# Altium PCB PMI_Split.PcbDoc
Units mm, origin at the board's own origin, x right, y up, seen from the top; angles counter-clockwise.
Board outline 65 x 25 mm, 2 copper layers (Top Layer, Bottom Layer); 15 components, 11 nets, 34 pads, 1 vias.
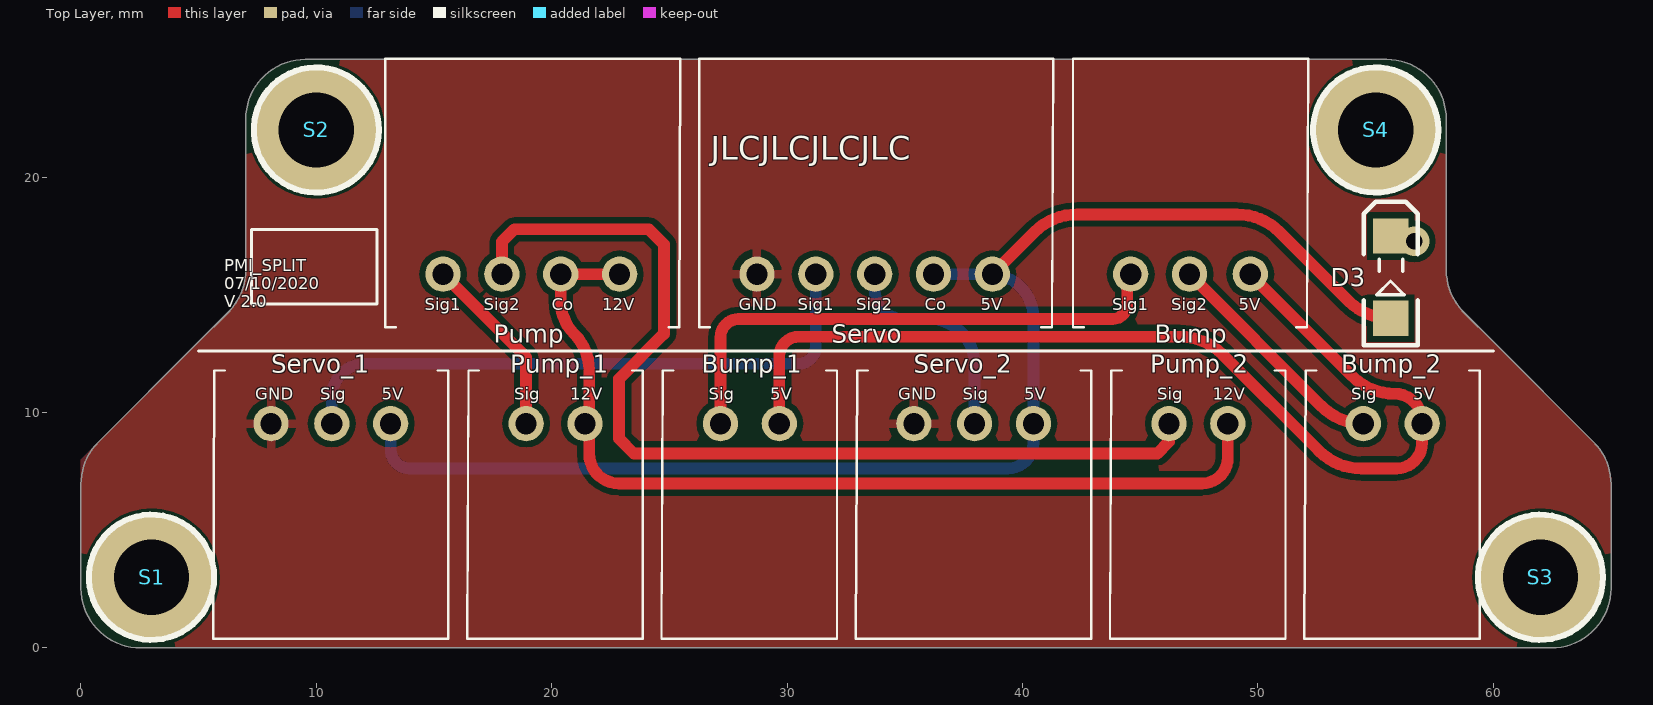
[diagram p0: Top Layer view]
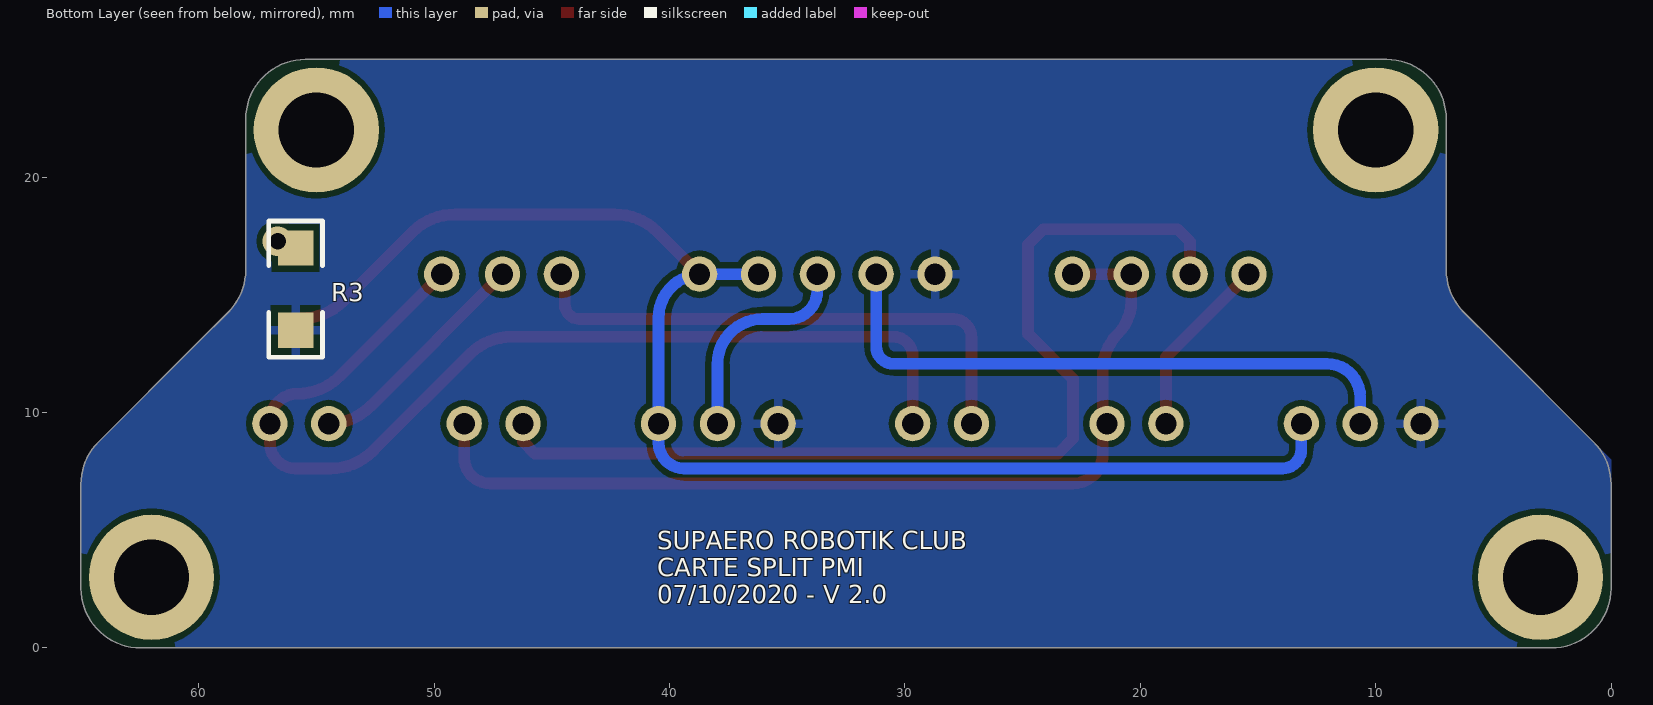
[diagram p1: Bottom Layer view, seen from below]
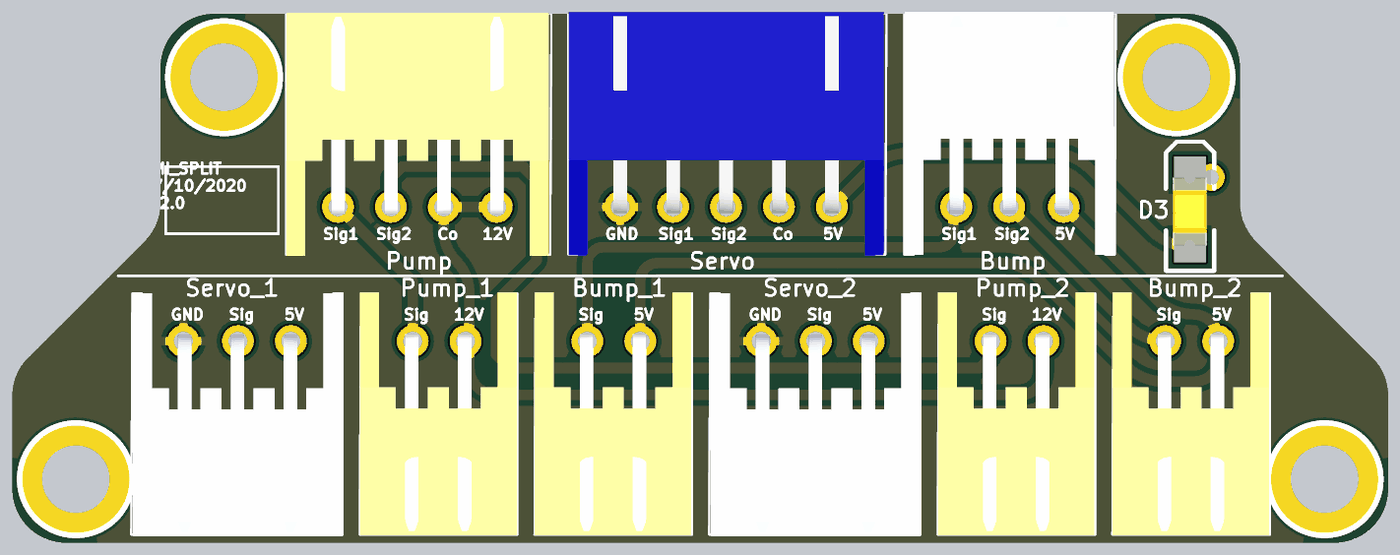
[diagram p2: 3D render of the assembled board from above, using the file's embedded part models]

## Layer stack, top to bottom
Top Solder: solder mask 0.0102, Solder Resist, Dk 3.5
Top Layer: signal copper 0.0356
Dielectric 1: dielectric 0.32, FR-4, Dk 4.8
Bottom Layer: signal copper 0.0356
Bottom Solder: solder mask 0.0102, Solder Resist, Dk 3.5

## Board outline
14,0 2.54,0 cw(c2.54,2.54) 0,2.54 0,4 0,6.948 cw(c2.54,6.948) 0.744,8.744 5,13 6.256,14.256 ccw(c4.46,16.052) 7,16.052 7,20 7,22.46 cw(c9.54,22.46) 9.54,25 13,25 55.46,25 cw(c55.46,22.46) 58,22.46 58,19 58,16.052 ccw(c60.54,16.052) 58.744,14.256 60,13 64.256,8.744 cw(c62.46,6.948) 65,6.948 65,5 65,2.54 cw(c62.46,2.54) 62.46,0 58,0

## Design rules (kind name [scope] priority, off if disabled: settings)
Clearance [All] p1: gap=0.254
ComponentClearance ComponentClearance_Screws [HasFootprint('Screw M3')] p1: gap=0 collisioncheckmode=3 verticalgap=0 showdistances=FALSE
ComponentClearance [All] p2: gap=0.254 collisioncheckmode=3 verticalgap=0.254 showdistances=FALSE
PolygonConnect [All] p1: connectstyle=Relief reliefconductorwidth=0.381 reliefentries=4 polygonreliefangle="90 Angle" airgapwidth=0.305
RoutingVias [All] p1: holewidth=0.711 width=1.27 viastyle="Through Hole" minholewidth=0.711 minwidth=1.27 maxholewidth=0.711 maxwidth=1.27
SolderMaskExpansion [All] p1: expansion=0.102
Width [All] p1: maxlimit=2 minlimit=0.1 preferedwidth=0.5
29 further rules are at their usual default settings.

## Components (designator, comment, footprint, x,y, rotation, side; value= is the part's Value field where it differs from the comment)
Bump "Header 3H" S3B-XH-A 44.593,15.875 r0 top locked
Bump_1 "Header 2H" S2B-XH-A 29.667,9.525 r180 top locked
Bump_2 "Header 2H" S2B-XH-A 56.972,9.525 r180 top locked
D3 "5V_A" KP-3216SEC 55.642,15.748 r90 top
Pump "Header 4H" S4B-XH-A 15.383,15.875 r0 top locked
Pump_1 "Header 2H" S2B-XH-A 21.412,9.525 r180 top locked
Pump_2 "Header 2H" S2B-XH-A 48.717,9.525 r180 top locked
R3 "Res2" "Resistor 1206" 55.88,15.24 r270 bottom
S1 "Screw M3" "Screw M3" 3,3 r0 top
S2 "Screw M3" "Screw M3" 10,22 r0 top
S3 "Screw M3" "Screw M3" 62,3 r0 top
S4 "Screw M3" "Screw M3" 55,22 r0 top
Servo "Header 5H" S5B-XH-A 28.718,15.875 r0 top locked
Servo_1 "S3B-XH-A" S3B-XH-A 13.157,9.525 r180 top locked
Servo_2 "S3B-XH-A" S3B-XH-A 40.462,9.525 r180 top locked

## Footprints (in the part's own frame and the unit in brackets; to place one, negate y for a bottom-side part, rotate by r counter-clockwise, add the part's x,y. Pads: shape width x height; smd on the part's side, far side on the other; paste and mask are expansions set on the pad)
KP-3216SEC [mm]
  rect 1.5x1.5 smd: 1(-1.75,0) 2(1.75,0)
  silkscreen extent -2.89,-1.14 3.2,1.14, body extent -1.7,-0.79 1.5,0.81, height 1.1
"Resistor 1206" [mm]
  rect 1.5x1.5 smd: 1(-1.75,0) 2(1.75,0)
  silkscreen extent -2.89,-1.14 2.89,1.14, body extent -1.98,-0.95 1.98,0.93, height 0.55
S2B-XH-A [mm]
  round 1.5 hole 0.9: 1(0,0) 2(2.5,0)
  silkscreen extent -2.45,-2.26 5,9.14, body extent -2.41,-2.32 4.99,9.18, height 6.15
S3B-XH-A [mm]
  round 1.5 hole 0.9: 1(0,0) 2(2.5,0) 3(5.08,0)
  silkscreen extent -2.45,-2.26 7.54,9.14, body extent -2.44,-2.27 7.46,9.23, height 6.15
S4B-XH-A [mm]
  round 1.5 hole 0.9: 1(0,0) 2(2.5,0) 3(5,0) 4(7.5,0)
  silkscreen extent -2.45,-2.26 10.08,9.14, body extent -2.44,-2.32 9.96,9.18, height 6.15
S5B-XH-A [mm]
  round 1.5 hole 0.9: 1(0,0) 2(2.5,0) 3(5,0) 4(7.5,0) 5(10,0)
  silkscreen extent -2.45,-2.26 12.58,9.14, body extent -2.45,-2.3 12.45,9.2, height 6.15
"Screw M3" [mm] "M3 iso Screw"
  round 5.32 hole 3.2 unplated: 0(0,0)
  silkscreen extent -2.66,-2.66 2.66,2.66

## Part data
Bump: "Header, 3-Pin, Right Angle"
Bump_1 Bump_2 Pump_1 Pump_2: "Header, 2-Pin, Right Angle"
D3: library part LED2, "Typical RED, GREEN, YELLOW, AMBER GaAs LED"
Pump: "Header, 4-Pin, Right Angle"
R3: "Resistor"
Servo: "Header, 5-Pin, Right Angle"
Servo_1 Servo_2: library part "Header 3H", "Header, 3-Pin, Right Angle"

## Via types
v1: diameter 1.27, hole 0.711, Top Layer to Bottom Layer, 1 vias

## Nets (pads, with @x,y where several pads share a name; then routed paths per layer and width w, separated by ;. In a path a pad name is that pad's centre, name@x,y a point inside that pad or via, vN(x,y) a via of type N, cw(c..) or ccw(c..) an arc to the next point about the centre after c; other vN are vias at no path point)
5V_L: Bump.3 Bump_1.1 Bump_2.1 | length 44.2
  Top Layer w0.5: Bump_1.1 29.667,12.403 cw(c30.48,12.403) 30.48,13.216 46.692,13.216 cw(c46.692,10.676) 48.488,12.472 52.596,8.364 ccw(c54.392,10.16) 54.392,7.62 55.88,7.62 ccw(c55.88,8.712) 56.972,8.712 Bump_2.1 56.972,9.628 ccw(c55.805,9.628) 55.805,10.795 cw(c55.805,13.335) 54.009,11.539 Bump.3
BUMP_1: Bump.1 Bump_1.2 | length 23.1
  Top Layer w0.5: Bump_1.2 27.167,13.197 cw(c27.94,13.197) 27.94,13.97 43.815,13.97 ccw(c43.815,14.605) 44.45,14.605 44.45,15.732 cw(c44.593,15.732) Bump.1
BUMP_2: Bump.2 Bump_2.2 | length 9.9
  Top Layer w0.5: Bump.2 52.715,10.253 ccw(c54.472,12.01) Bump_2.2
GND_A: R3.2 Servo.1 Servo_1.3 Servo_2.3
NetD3_2: D3.2 R3.1
  other v1: 56.642,17.272
PUMP_1: Pump.1 Pump_1.2 | length 7.8
  Top Layer w0.5: Pump.1 18.912,12.346 Pump_1.2
PUMP_2: Pump.2 Pump_2.2 | length 42.4
  Top Layer w0.5: Pump.2 17.883,17.248 18.415,17.78 24.13,17.78 24.765,17.145 24.765,13.335 22.86,11.43 22.86,8.89 23.495,8.255 45.72,8.255 46.217,8.752 Pump_2.2
PUMP_L_CO: Pump.3 Pump.4 Pump_1.1 Pump_2.1 | length 40.4
  Top Layer w0.5: Pump.4 Pump.3 20.383,14.716 ccw(c22.336,14.716) 20.955,13.335 cw(c19.422,11.802) 21.59,11.802 21.59,8.255 ccw(c22.86,8.255) 22.86,6.985 47.625,6.985 ccw(c47.625,8.077) 48.717,8.077 Pump_2.1
SERVO_1: Servo.2 Servo_1.2 | length 26
  Bottom Layer w0.5: Servo_1.2 10.657,10.657 cw(c12.065,10.657) 12.065,12.065 30.48,12.065 ccw(c30.48,12.803) 31.218,12.803 Servo.2
SERVO_2: Servo.3 Servo_2.2 | length 9.2
  Bottom Layer w0.5: Servo.3 33.718,15.177 ccw(c34.925,15.177) 34.925,13.97 36.035,13.97 cw(c36.035,12.043) 37.962,12.043 Servo_2.2
SERVO_L_CO: D3.1 Servo.4 Servo.5 Servo_1.1 Servo_2.1 | length 59.6
  Top Layer w0.5: Servo.5 40.514,17.671 cw(c42.31,15.875) 42.31,18.415 49.113,18.415 cw(c49.113,15.875) 50.909,17.671 53.838,14.742 ccw(c55.634,16.538) 55.634,13.998 D3.1
  Bottom Layer w0.5: Servo_1.1 13.157,8.433 ccw(c13.97,8.433) 13.97,7.62 39.37,7.62 ccw(c39.37,8.712) 40.462,8.712 Servo_2.1 40.462,14.021 ccw(c38.608,14.021) 38.608,15.875 Servo.4
pads on no net: S1.0 S2.0 S3.0 S4.0

## Polygon pours and split planes (outlines as drawn)
GND_A on Top Layer "Top GND" (solid, remove dead copper, pour order 2): 0,3 0,8 4,12 6.256,14.256 ccw(c4.46,16.052) 7,16.052 7,19 7,22.46 cw(c9.54,22.46) 9.54,25 26,25 55.46,25 cw(c55.46,22.46) 58,22.46 58,20 58,16.052 ccw(c60.54,16.052) 58.744,14.256 61,12 64.256,8.744 cw(c62.46,6.948) 65,6.948 65,5 65,2.54 cw(c62.46,2.54) 62.46,0 59,0 2.54,0 cw(c2.54,2.54) 0,2.54
GND_A on Bottom Layer "Bot GND" (solid, remove dead copper, pour order 1): 0,3 0,8 4,12 6.256,14.256 ccw(c4.46,16.052) 7,16.052 7,19 7,22.46 cw(c9.54,22.46) 9.54,25 26,25 55.46,25 cw(c55.46,22.46) 58,22.46 58,20 58,16.052 ccw(c60.54,16.052) 58.744,14.256 61,12 64.256,8.744 cw(c62.46,6.948) 65,6.948 65,5 65,2.54 cw(c62.46,2.54) 62.46,0 59,0 2.54,0 cw(c2.54,2.54) 0,2.54

## Silkscreen, mask and mechanical layers (free items; w line width, h text height)
Top Overlay:
  lines w0.127: 5,12.619 60,12.619 ; 7.239,14.605 12.573,14.605 12.573,17.78 7.239,17.78 7.239,14.605
  text "JLCJLCJLCJLC" at 26.752,20.733 h1
  text "PMI_SPLIT / 07/10/2020 / V 2.0" at 6.096,14.478 h0.51
  text "Sig1" at 14.605,14.351 h0.51
  text "Sig2" at 17.105,14.351 h0.51
  text "Co" at 20.002,14.351 h0.51
  text "12V" at 22.138,14.351 h0.51
  text "GND" at 27.94,14.351 h0.51
  text "Sig1" at 30.44,14.351 h0.51
  text "Sig2" at 32.94,14.351 h0.51
  text "Co" at 35.837,14.351 h0.51
  text "5V" at 38.227,14.351 h0.51
  text "Sig1" at 43.815,14.351 h0.51
  text "Sig2" at 46.315,14.351 h0.51
  text "5V" at 49.182,14.351 h0.51
  text "GND" at 7.409,10.541 h0.51
  text "Sig" at 10.156,10.541 h0.51
  text "5V" at 12.776,10.541 h0.51
  text "Sig" at 18.411,10.541 h0.51
  text "12V" at 20.784,10.541 h0.51
  text "Sig" at 26.666,10.541 h0.51
  text "5V" at 29.286,10.541 h0.51
  text "GND" at 34.714,10.541 h0.51
  text "Sig" at 37.461,10.541 h0.51
  text "5V" at 40.081,10.541 h0.51
  text "Sig" at 45.716,10.541 h0.51
  text "12V" at 48.089,10.541 h0.51
  text "Sig" at 53.971,10.541 h0.51
  text "5V" at 56.591,10.541 h0.51
Bottom Overlay:
  text "SUPAERO ROBOTIK CLUB / CARTE SPLIT PMI / 07/10/2020 - V 2.0" at 40.513,1.905 h0.76
Mechanical 2:
  lines w0.254: 0,3 ccw(c3,3) 3,0 62,0 ccw(c62,3) 65,3 65,6.73 ccw(c61.934,6.73) 64.102,8.898 58.898,14.102 cw(c61.066,16.27) 58,16.27 58,22 ccw(c55,22) 55,25 11,25 10,25 ccw(c10,22) 7,22 7,16.27 cw(c3.934,16.27) 6.102,14.102 0.898,8.898 ccw(c3.066,6.73) 0,6.73 0,3

## Dimensions
12.933,25.019 to 14,0 on Mechanical 3
0,4 to 10,22 on Mechanical 3
55,22 to 65,5 on Mechanical 3
10,22 to 55,22 on Mechanical 3
0,6.948 to 65,6.948 on Mechanical 3